# Altium PCB Sensor_Box_RGB_CTRL.PCBDOC (part 2 of 2)
Units mil, origin at the board's own origin, x right, y up, seen from the top; angles counter-clockwise.
Board outline 895.86 x 2876.17 mil, 2 copper layers (Top, Bot), stack 61.855 mil thick; 64 components, 53 nets, 223 pads, 84 vias.
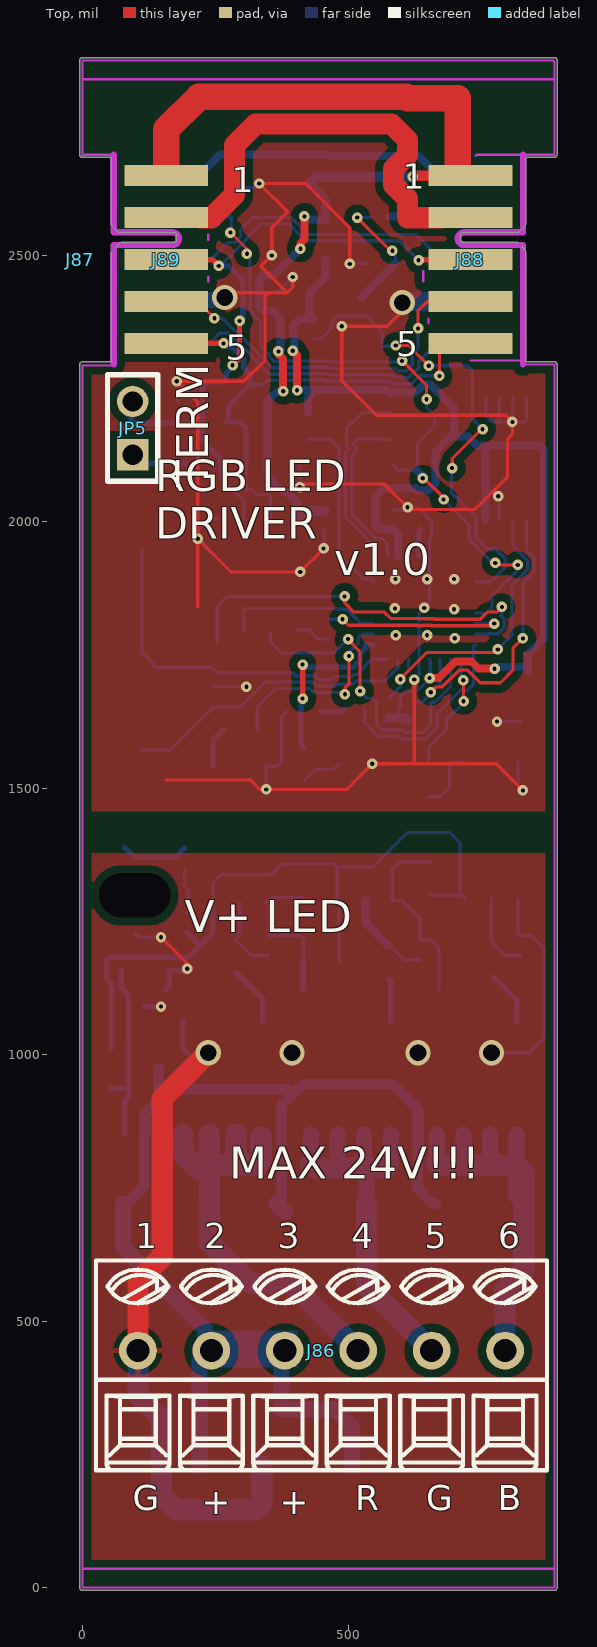
[diagram p0: Top view]

## Via types
v1: diameter 19.68, hole 7.87, Top to Bot, tented both sides, 78 vias
v2: diameter 47.24, hole 31.5, Top to Bot, tented both sides, 6 vias

## Nets (pads, with @x,y where several pads share a name; then routed paths per layer and width w, separated by ;. In a path a pad name is that pad's centre, name@x,y a point inside that pad or via, vN(x,y) a via of type N, cw(c..) or ccw(c..) an arc to the next point about the centre after c; other vN are vias at no path point) (continued)
P3V3: (continued)
  Bot w15: v1(395,2321) 398.34,2324.34 398.34,2347.67 395,2351.01 395,2367 408.71,2380.71 426.5,2380.71 R320.2 426.5,2387.28 426.5,2430 456.18,2459.68 IC72.2@456.18,2492.6 ; v1(403,2247) 403.56,2247.56 435.34,2247.56 ; J91.2@423.23,2205 423.23,2232.25 435.34,2244.36 435.34,2247.56 ; R388.1 593.53,1633.07 605.28,1633.07 R384.1@613.16,1625.2 ; IC78.18 592.52,1976.38 C192.2 556.78,1986.22 550,1993 550,2048 565,2063 624.99,2063 629.33,2058.66 648.67,2058.66 662.34,2072.33 662.34,2131.79 690.94,2160.39 ; IC80.8 756.89,2142.02 757.87,2143.01 ; v1(773.68,1724.46) 773.68,1725.46 775.68,1727.46 TP21.1 ; TP21.1@836,1720 836,1751.5 866,1781.5 866,2135.97 858.96,2143.01 757.87,2143.01 ; 435.34,2247.56 570.52,2247.56 575.42,2242.66 624.58,2242.66 639.58,2257.66 653.33,2257.66 697.64,2213.35 R312.1 697.64,2167.08 690.94,2160.39 ; 690.94,2160.39 723.47,2160.39 740.85,2143.01 757.87,2143.01
P5V0: C215.2 C219.1 IC72.1 IC79.8 J88.1 J89.1 | length 1959.8
  Top w15: v1(368,2320) 368,2314.99 377,2305.99 v1(377,2245) ; v1(409.31,2512.63) 409.31,2522.69 416.81,2530.19 v1(416.81,2573.31)
  Top w20: v1(620.08,2647.64) 622.05,2649.61 J88.1
  Top w50: J89.1@157.48,2667.32 157.48,2736.22 219,2797.74 608.23,2797.74 610.69,2795.28 704.72,2795.28 J88.1@704.72,2657.48
  Bot w15: v1(368,2320) 371.66,2323.66 371.66,2362.66 372,2363 372,2381 356.19,2396.81 339.21,2396.81 332.33,2403.69 332.33,2448.23 331.3,2449.27 331.3,2455.28 339.21,2463.19 359.87,2463.19 v1(409.31,2512.63) ; v1(377,2245) 365.93,2245 347.48,2226.55 347.48,2085.45 377.15,2055.78 384.2,2055.78 403.23,2036.76 IC79.8 ; v1(416.81,2573.31) 422.72,2567.4 IC72.1 456.18,2567.4 456.18,2605.31 426.5,2635
  Bot w20: IC79.8 417.46,2020.13 C219.1 ; 426.5,2635 439.13,2647.64 v1(620.08,2647.64)
P12V0: J88.2 J89.2 | length 822.8
  Top w15: J89.2 J89.2@221.87,2570.87
  Top w40: J89.2@221.87,2570.87 242.6,2570.87 285.43,2613.7 285.43,2706.69 325.48,2746.74 580.03,2746.74 610.24,2716.54 610.24,2688.71 584.08,2662.55 584.08,2632.73 610.24,2606.57 610.24,2570.87 J88.2@673.13,2570.87
P12V_LED: C213.2 C217.1 C218.1 C220.1 IC73.6 IC74.6 IC77.6 R331.2 T19.2 | length 1382
  Bot w6: IC73.6 245.28,1322.05 261.81,1338.58 354.33,1338.58 374.02,1358.27 C220.1 472.44,1358.27 478.54,1352.17 ; C213.2 481.5,1178.94 IC74.6 478.54,1292.32 478.54,1352.17 ; C218.1 IC77.6@708.66,1299.21 ; IC77.6 711.81,1299.21 IC77.6@708.66,1299.21 ; 478.54,1352.17 545.08,1352.17 610.24,1417.32 688.98,1417.32 708.66,1397.64 IC77.6@708.66,1299.21
  Bot w10: T19.2 55.12,1013.78 C217.1 55.12,1134.44 45.69,1143.87 45.69,1180.1 48.66,1183.07 198.82,1183.07 222.05,1206.3 ; R331.2 197.64,1229.53 204.06,1223.11 204.06,1222.32 220.08,1206.3 222.05,1206.3 ; IC73.6 245.28,1229.53 222.05,1206.3
PROG_MISO: IC78.16 J91.1 | length 388.3
  Bot w6: IC78.16 545.28,1957.42 493.53,2009.17 493.53,2129.66 500.92,2137.05 495.47,2142.5 495.47,2175.47 525,2205 J91.1@576.77,2205
PROG_MOSI: IC78.15 J91.4 | length 352.8
  Bot w6: J91.4@423.23,2155 466,2155 481.53,2139.47 481.53,1939.32 528.27,1892.57 545.28,1892.57 IC78.15
PROG_SCK: IC78.17 J91.3 | length 326.7
  Bot w6: J91.3@561.77,2155 J91.3@576.77,2155 ; J91.3 516,2156 507.47,2147.47 514.34,2140.6 514.34,2133.5 505.53,2124.69 505.53,2014.14 549.94,1969.72 562.04,1969.72 572.83,1958.93 IC78.17
PWM_B: IC78.1 R313.1 | length 226.6
  Top w6: v1(715,1703) 715.55,1702.45 v1(715.55,1663.39)
  Bot w6: R313.1 649.61,1576.26 683.29,1609.94 683.29,1627.92 715.55,1660.18 v1(715.55,1663.39) ; IC78.1 710.63,1707.68 711.82,1708.87 715,1705.68 v1(715,1703)
PWM_G: IC78.9 R306.1 | length 322
  Top w10: v1(413.39,1668.44) v1(413.39,1732.28)
  Bot w10: v1(413.39,1668.44) 410.27,1665.32 410.27,1582.5 R306.1 ; v1(413.39,1732.28) 418.2,1727.46 502.57,1727.46 508.9,1727.46 521.11,1739.67 521.11,1752.46 531.59,1762.94 531.59,1769.69 IC78.9
PWM_R: IC78.10 R303.1 | length 372.6
  Top w6: v1(492.81,1676.44) 492.81,1687.77 501.97,1696.93 500.27,1698.63 v1(500.27,1748.31)
  Bot w6: R303.1 328.34,1652.55 363.07,1687.28 427.32,1687.28 435.01,1679.59 489.65,1679.59 v1(492.81,1676.44) ; v1(500.27,1748.31) 500.27,1755.07 517.59,1772.39 517.59,1781.37 525.59,1789.37 IC78.10
RESETn: D88.1 IC78.29 J89.7 J91.5 R312.2 | length 1391.4
  Top w6: v1(278,2543) 309,2512 v1(309,2503) ; v1(600,2302) 647,2255 646,2254 v1(646,2230) ; v1@640,2083 678,2045 v1(678,2042) ; v1(775,1923) 778.71,1919.29 v1(816.93,1919.29)
  Top w15: v1(639,2082) v1@640,2083
  Bot w6: J89.7 159.06,2572.44 D88.1 280,2545 v1(278,2543) ; v1(309,2503) 314.8,2497.2 314.8,2442.43 315.83,2441.4 315.83,2401.12 314.8,2400.09 314.8,2397.89 319.12,2393.57 319.12,2391.54 334.15,2376.5 334.15,2330.51 349.16,2315.51 349.16,2312.2 360.2,2301.16 375.8,2301.16 376.8,2302.16 468.97,2302.16 471.08,2300.06 603.06,2300.06 601.11,2302 v1(600,2302) ; J91.5@583.02,2106 593,2096.02 593.77,2096.8 627.25,2096.8 628.8,2096.8 628.8,2147.03 660.63,2178.87 R312.2 646,2214.63 v1(646,2230) ; v1(678,2042) 726.19,1993.81 726.19,1966.16 769.35,1923 v1(775,1923) ; IC78.29 758.16,1828.74 768.56,1839.14 768.56,1861.24 816.93,1909.61 v1(816.93,1919.29)
  Bot w15: 627.25,2096.8 639,2085.04 v1(639,2082)
RGB_V: C214.2 D76.1 D77.1 D78.1 D79.1 J86.2 J86.3 R301.1 R302.1 T19.3 | length 2278.3
  Bot w20: D76.1 82.87,720.47 116.18,753.78 116.18,850.39 R302.1 R301.1 143.7,916.54 143.7,935.04 ; T19.3 143.7,935.04 ; D78.1@364.17,720.47 374.02,730.31 374.02,905.51 394.69,926.18 ; D79.1 657.48,720.47 629.16,748.8 629.16,814.32 629.92,815.08 629.92,897.64 582.68,944.88 413.39,944.88 394.69,926.18 ; 143.7,935.04 385.83,935.04 394.69,926.18
  Bot w30: D76.1 76.77,639.24 230.01,486 230.01,457 J86.2 ; C214.2@219.56,228.85 219.56,422.31 J86.2 ; D78.1@364.17,720.47 D78.1@379.92,704.72 ; D77.1 505.91,303.15 474.41,334.65 374.02,334.65 374.02,438.97 J86.3 J86.2
SCL1: IC78.6 IC80.6 R388.2 | length 575.1
  Top w6: v1(596.91,1704.56) 596.91,1705.22 646.53,1754.84 779.58,1754.84 v1(779.58,1760.69)
  Bot w6: R388.2 576.21,1670.08 596.91,1690.78 v1(596.91,1704.56) 596.91,1705.22 612.2,1720.52 IC78.6 ; v1(779.58,1760.69) 806.24,1787.35 806.24,1881.96 835.77,1911.48 835.77,1927.09 808.07,1954.79 IC80.6
SDA1: IC78.3 IC80.5 R384.2 | length 604.2
  Top w6: v1(654,1680.26) 664.09,1690.35 675.71,1690.35 707.2,1721.84 723.13,1721.84 746.81,1698.16 784.8,1698.16 808.07,1721.42 808.07,1762.52 v1(826.77,1781.23)
  Bot w6: R384.2 638.58,1662.2 671.26,1694.88 IC78.3 ; v1(826.77,1781.23) 826.77,1885.51 847.77,1906.51 847.77,1932.06 833.66,1946.17 IC80.5
pads on no net: IC78.12 IC78.13 IC78.14 IC78.23 IC78.24 IC78.25 IC78.27 IC78.28 LD25.3

## Polygon pours and split planes (outlines as drawn)
GND on Top "Signal Layer 1-No Net 1" (solid, remove dead copper, pour order 2): 0,2866.14 883.86,2866.14 885.83,2864.17 885.83,1456.69 0,1456.69
GND_LED on Top "Signal Layer 1-No Net 1" (solid, remove dead copper, pour order 4): 885.83,1377.95 885.83,0 0,0 0,1377.95
GND_LED on Bot "Signal Layer 1-No Net 1" (solid, remove dead copper, pour order 0): 801.18,1118.11 801.18,978.35 787.4,964.57 175.2,964.57 155.51,984.25 155.51,1062.99 100.39,1062.99 98.43,1061.02 96.46,1062.99 96.46,1131.89 787.4,1131.89

## Keep-outs
Top:
  lines w3.94: 0,35.43 885.83,35.43 ; 0,2830.71 885.83,2830.71
Bot:
  lines w3.94: 0,104.33 885.83,104.33 ; 0,2761.81 885.83,2761.81
KeepOutLayer:
  lines w3.94: 59.06,2295.28 57.09,2293.31 0,2293.31 0,0 885.83,0 885.83,2295.28 ; 59.06,2688.98 1.97,2688.98 0,2687.01 0,2866 884,2866 885.83,2864.17 885.83,2688.98 826.77,2688.98 ; 236.22,2450.79 236.22,2460.63 ; 236.22,2529.53 236.22,2539.37 ; 639.76,2450.79 639.76,2470.47 ; 649.61,2372.05 649.61,2381.89 ; 728.35,2303.15 826.77,2303.15 826.77,2295.28 885.83,2295.28 ; 738.19,2687.01 740.16,2688.98 826.77,2688.98 ; 826.77,2688.98 826.77,2688.98 ; 885.83,2295.28 885.83,2295.28

## Other copper
Bot:
  rectangle net RGB_V: 226.38,413.39 403.54,482.28
  rectangle net GND: 196.85,2401.57 275.59,2431.1
  rectangle net GND: 600.39,2395.39 669.29,2431.1

## Silkscreen, mask and mechanical layers (free items; w line width, h text height)
TopOverlay:
  text "TERM" at 236.22,2064.72 h60 r90
  text "RGB LED / DRIVER" at 136.61,1968.5 h59.06
  text "v1.0" at 472.44,1899.61 h60
  text "V+ LED" at 192.07,1230.31 h60
  text "MAX 24V!!!" at 275.59,767.72 h60
  text "G" at 94.49,145.67 h47.24
  text "R" at 511.81,145.67 h47.24
  text "G" at 645.67,145.67 h47.24
  text "B" at 779.53,145.67 h47.24
  text "+" at 224.41,137.8 h47.24
  text "+" at 370.08,137.8 h47.24
BottomOverlay:
  text "ACT" at 474.07,1683.07 h60
Mechanical1:
  lines w10: 874.02,2295.28 826.77,2295.28 ; 874.02,2688.98 826.77,2688.98 ; 0,2295.28 59.06,2295.28 ; 0,2295.28 59.06,2295.28 ; 0,2295.28 0,0 885.83,0 885.83,59.06 885.83,2295.28 826.77,2295.28 ; 59.06,2295.28 59.06,2503.94 74.8,2519.68 181.1,2519.68 181.1,2531.5 181.1,2543 75.11,2543 59.06,2559.06 59.06,2688.98 0,2688.98 0,2866.14 885.83,2866.14 885.83,2688.98 ; 826.77,2295.28 826.77,2507.87 822.84,2511.81 814.96,2519.69 704.73,2519.69 704.73,2543.31 815.31,2543.31 826.77,2554.77 826.77,2688.98 ; 826.77,2688.98 885.83,2688.98 ; 826.77,2688.98 885.83,2688.98 ; 826.77,2688.98 885.83,2688.98

## Text inside footprints (layer, text, board x,y; h text height)
J86: TopOverlay "6" at 780.19,636.81 h47.24; TopOverlay "1" at 99.65,636.81 h47.24; TopOverlay "5" at 642.39,636.81 h47.24; TopOverlay "2" at 229,636.81 h47.24; TopOverlay "4" at 504.59,636.81 h47.24; TopOverlay "3" at 366.8,636.81 h47.24; Mechanical14 "6" at 780.19,636.81 h47.24; Mechanical14 "1" at 99.65,636.81 h47.24; Mechanical14 "5" at 642.39,636.81 h47.24; Mechanical14 "2" at 229,636.81 h47.24; Mechanical14 "4" at 504.59,636.81 h47.24; Mechanical14 "3" at 366.8,636.81 h47.24
J88: TopOverlay "1" at 601.38,2625.2 h47.24; TopOverlay "5" at 589.57,2311.02 h47.24; BottomOverlay "6" at 596.46,2672.44 h47.24 r180; BottomOverlay "10" at 555.12,2358.27 h47.24 r180
J89: TopOverlay "5" at 268.7,2303.94 h47.24; TopOverlay "1" at 280.51,2618.11 h47.24; BottomOverlay "10" at 273.62,2351.18 h47.24 r180; BottomOverlay "6" at 285.43,2665.35 h47.24 r180